# Altium PCB pcb_drive_2024-08-23.pcbdoc
Units mm, origin at the board's own origin, x right, y up, seen from the top; angles counter-clockwise.
Board outline 81.4 x 79.65 mm, 2 copper layers (Top Layer, Bottom Layer); 50 components, 76 nets, 265 pads, 364 vias.
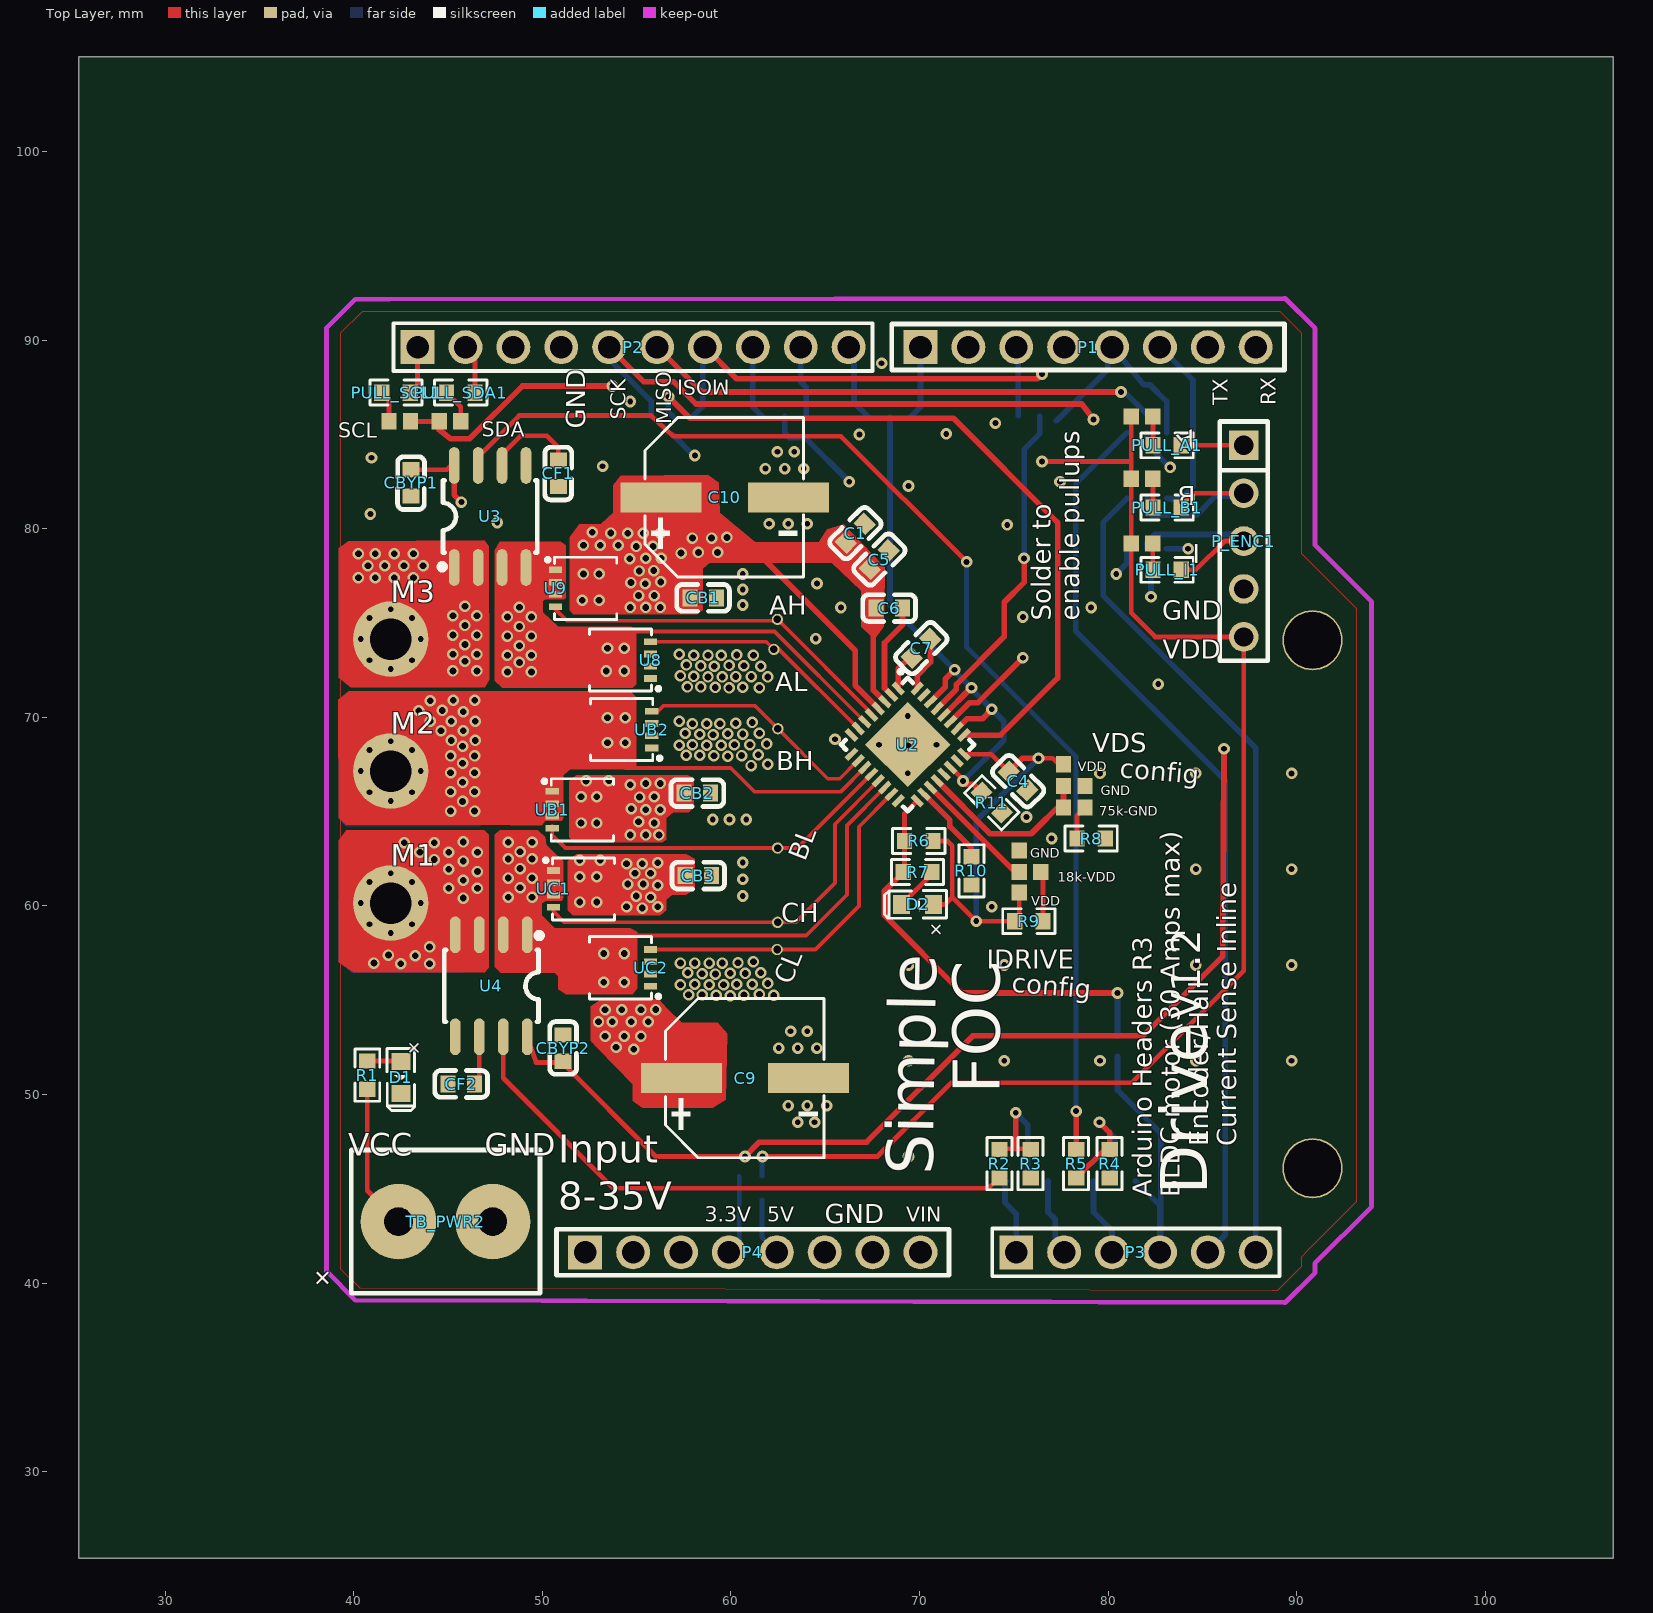
[diagram p0: Top Layer view]
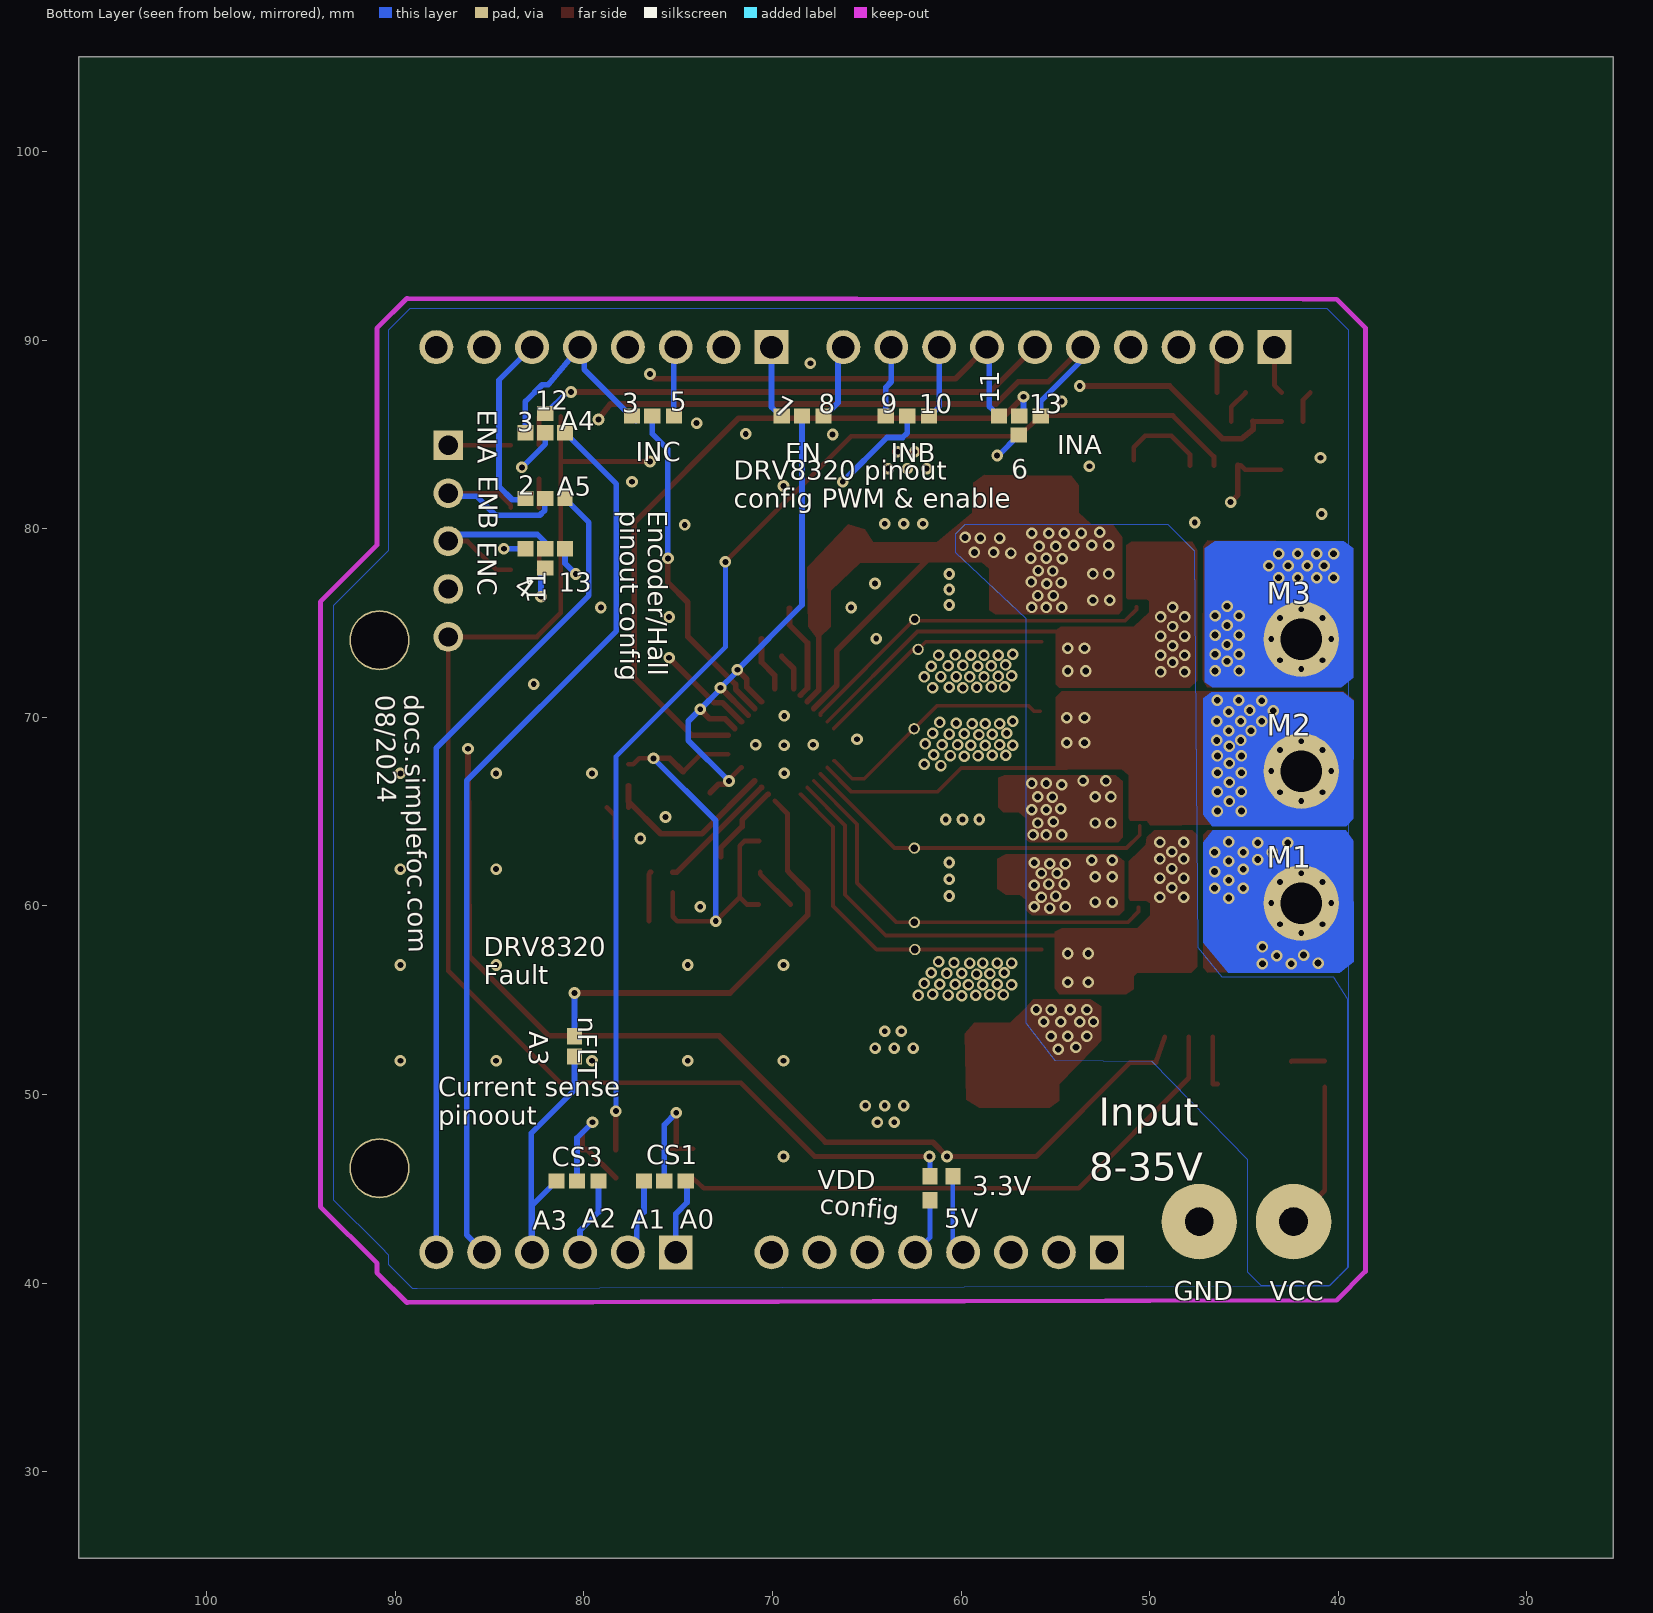
[diagram p1: Bottom Layer view, seen from below]

## Layer stack, top to bottom
Top Layer: signal copper (thickness not stored)
Dielectric: dielectric 0.32, FR-4, Dk 4.8
Bottom Layer: signal copper (thickness not stored)

## Board outline
106.799,25.4 25.4,25.4 25.4,105.046 106.799,105.046

## Components (designator, comment, footprint, x,y, rotation, side; value= is the part's Value field where it differs from the comment)
C1 "C0603B104K160NT" C0603 66.591,79.766 r225 top
C4 "1uF" C0603 75.227,66.622 r135 top
C5 "C0603B104K160NT" C0603 67.861,78.369 r225 top
C6 "1uF" C0603 68.398,75.795 r0 top
C7 "47nF" C0603 70.084,73.67 r225 top
C9 "220uF" CAP-SMD_BD8.0-L8.3-W8.3-LS9.5-FD 60.749,50.874 r0 top
C10 "220uF" CAP-SMD_BD8.0-L8.3-W8.3-LS9.5-FD 59.67,81.671 r0 top
CB1 "C0603B104K160NT" C0603 58.527,76.337 r0 top
CB2 "C0603B104K160NT" C0603 58.209,65.987 r180 top
CB3 "C0603B104K160NT" C0603 58.273,61.605 r0 top
CBYP1 "1uF" C0603 43.033,82.433 r90 top
CBYP2 "1uF" C0603 51.097,52.461 r270 top
CF1 "1nF" C0603 50.843,82.941 r90 top
CF2 "1nF" C0603 45.7,50.556 r0 top
D1 "LED-0603_R" LED0603_RED 42.49,50.903 r270 top
D2 "LED-0603_R" LED0603_RED 69.893,60.081 r180 top
M1 "M2 PLATED HOLE WITH MINI HOLES" "M2 PLATED HOLE WITH MINI HOLES" 41.954,60.152 r0 top
M2 "M2 PLATED HOLE WITH MINI HOLES" "M2 PLATED HOLE WITH MINI HOLES" 41.954,67.152 r0 top
M3 "M2 PLATED HOLE WITH MINI HOLES" "M2 PLATED HOLE WITH MINI HOLES" 41.954,74.152 r0 top
P1 "Header-Female-2.54_1x8" HDR-TH_8P-P2.54-V-F-1 78.939,89.638 r0 top
P2 "Header-Male-2.54_1x10" HDR-TH_10P-P2.54-V-M-1 54.809,89.638 r0 top
P3 "HEADER_6" HDR-M-2.54_1X6 81.479,41.632 r0 top
P4 "Header-Female-2.54_1x8" HDR-TH_8P-P2.54-V-F-1 61.159,41.632 r0 top
P_ENC1 "Header-Female-2.54_1x5" HDR-TH_5P-P2.54-V-F 87.194,79.351 r270 top
PULL_A1 "3.3k" R0603 83.13,84.431 r0 top
PULL_B1 "3.3k" R0603 83.13,81.129 r0 top
PULL_I1 "3.3k" R0603 83.13,77.827 r0 top
PULL_SCL1 "4.7k" R0603 42.236,87.225 r0 top
PULL_SDA1 "4.7k" R0603 45.665,87.225 r0 top
R1 "4.7k" R0603 40.712,51.03 r270 top
R2 "4.7k" R0603 74.24,46.331 r90 top
R3 "10k" R0603 75.891,46.331 r270 top
R4 "10K" R0603 80.082,46.331 r270 top
R5 "4.7k" R0603 78.304,46.331 r270 top
R6 "4.7k" R0603 69.958,63.448 r0 top
R7 "4.7k" R0603 69.894,61.797 r0 top
R8 "75k" R0603 79.101,63.574 r0 top
R9 "18k" R0603 75.8,59.194 r180 top
R10 "47k" R0603 72.751,61.859 r270 top
R11 "4.7kΩ" R0603 73.83,65.479 r135 top
TB_PWR2 "TB002-500-02BE" TB002-500-02BE 42.363,43.258 r0 top
U2 "DRV8320HRTVT" WQFN-32_L5.0-W5.0-P0.50-TL-EP 69.371,68.556 r315 top
U3 "ACS712ELCTR-30A-T" SOIC-8_L5.0-W4.0-P1.27-LS6.0-BL 47.224,80.655 r0 top
U4 "ACS712ELCTR-30A-T" SOIC-8_L5.0-W4.0-P1.27-LS6.0-BL 47.287,55.763 r180 top
U8 "BSZ0901NSATMA1" DFN-8_L3.3-W3.3-P0.65-BL-2 54.969,73.036 r90 top
U9 "BSZ0901NSATMA1" DFN-8_L3.3-W3.3-P0.65-BL-2 51.464,76.846 r270 top
UB1 "BSZ0901NSATMA1" DFN-8_L3.3-W3.3-P0.65-BL-2 51.288,65.098 r270 top
UB2 "BSZ0901NSATMA1" DFN-8_L3.3-W3.3-P0.65-BL-2 55.034,69.352 r90 top
UC1 "BSZ0901NSATMA1" DFN-8_L3.3-W3.3-P0.65-BL-2 51.351,60.907 r270 top
UC2 "BSZ0901NSATMA1" DFN-8_L3.3-W3.3-P0.65-BL-2 54.971,56.716 r90 top

## Footprints (in the part's own frame and the unit in brackets; to place one, negate y for a bottom-side part, rotate by r counter-clockwise, add the part's x,y. Pads: shape width x height; smd on the part's side, far side on the other; paste and mask are expansions set on the pad)
C0603 [mm]
  rect 0.8x0.9 smd paste+0 mask+0.051: 1(-0.7,0) 2(0.7,0)
  silkscreen extent -1.41,-0.71 1.39,0.72
CAP-SMD_BD8.0-L8.3-W8.3-LS9.5-FD [mm]
  rect 4.3x1.6 smd paste+0 mask+0.051: 1(-3.373,0) 2(3.373,0)
  silkscreen extent -4.23,-4.23 4.18,4.23
DFN-8_L3.3-W3.3-P0.65-BL-2 [mm]
  rect 0.35x0.7 smd paste-100 mask+0.051: 1(-0.975,-0.765) 2(-0.325,-0.765) 3(0.325,-0.765) 4(0.975,-0.765)
  Top Layer region: -1.176,0.187 -1.176,2.115 -1.176,2.115 -1.176,2.685 -0.775,2.685 -0.775,2.115 -0.526,2.115 -0.526,2.685 -0.125,2.685 -0.125,2.115 0.125,2.115 0.125,2.685 0.525,2.685 0.525,2.115 0.774,2.115 0.774,2.685 0.774,2.115 0.774,2.685 1.176,2.685 1.176,2.115 1.176,2.115 1.176,0.187
  silkscreen extent -1.65,-1.28 1.65,2.48
HDR-M-2.54_1X6 [mm]
  rect 1.8x1.8 hole 1.2 paste+0 mask+0.051: 1(-6.35,0)
  round 1.8 hole 1.2 paste+0 mask+0.051: 2(-3.81,0) 3(-1.27,0) 4(1.27,0) 5(3.81,0) 6(6.35,0)
  silkscreen extent -7.62,-1.27 7.62,1.27
HDR-TH_5P-P2.54-V-F [mil]
  rect 62x62 hole 40.16 paste+0 mask+2: 1(-200,0)
  round 62 hole 40.16 paste+0 mask+2: 2(-100,0) 3(0,0) 4(100,0) 5(200,0)
  silkscreen extent -250,-50 250,50
HDR-TH_8P-P2.54-V-F-1 [mm]
  rect 1.8x1.8 hole 1.2 paste+0 mask+0.051: 1(-8.89,0)
  round 1.8 hole 1.2 paste+0 mask+0.051: 2(-6.35,0) 3(-3.81,0) 4(-1.27,0) 5(1.27,0) 6(3.81,0) 7(6.35,0) 8(8.89,0)
  silkscreen extent -10.41,-1.22 10.41,1.22
HDR-TH_10P-P2.54-V-M-1 [mm]
  rect 1.8x1.8 hole 1.2 paste+0 mask+0.051: 1(-11.43,0)
  round 1.8 hole 1.2 paste+0 mask+0.081: 2(-8.89,0) 3(-6.35,0) 4(-3.81,0) 5(-1.27,0) 6(1.27,0) 7(3.81,0) 8(6.35,0) 9(8.89,0) 10(11.43,0)
  silkscreen extent -12.7,-1.27 12.7,1.27
LED0603_RED [mm]
  rect 0.9x1 smd paste+0 mask+0.051: 1(-0.85,0) 2(0.85,0)
  silkscreen extent -1.54,-0.73 1.75,0.73
"M2 PLATED HOLE WITH MINI HOLES" [mm]
  round 0.61 hole 0.305 paste+0: 1(-1.588,0) 1(-1.123,-1.123) 1(-1.123,1.123) 1(0,-1.588) 1(0,1.588) 1(1.123,-1.123) 1(1.123,1.123) 1(1.588,0)
  round 4 hole 2.2 paste+0 mask+0.051: 1(0,0)
R0603 [mm]
  rect 0.806x0.864 smd paste-100 mask+0.051: 1(-0.753,0) 2(0.753,0)
  silkscreen extent -1.39,-0.66 1.39,0.66
SOIC-8_L5.0-W4.0-P1.27-LS6.0-BL [mil]
  oval 22.38x76.78 smd paste+0 mask+2: 1(-75,-106.5) 2(-25,-106.5) 3(25,-106.5) 4(75,-106.5) 5(75,106.5) 6(25,106.5) 7(-25,106.5) 8(-75,106.5)
  silkscreen extent -106,-111 98,75
TB002-500-02BE [mm]
  round 4 hole 1.5 slot 1.505 at 0 deg paste+0 mask+0.051: 1(0,0) 2(5,0)
  silkscreen extent -2.5,-3.8 7.5,3.8
WQFN-32_L5.0-W5.0-P0.50-TL-EP [mil]
  rect 30x11.3 smd paste+0 mask+2: 1(-97,68.9) 2(-97,49.21) 3(-97,29.53) 4(-97,9.84) 5(-97,-9.84) 6(-97,-29.53) 7(-97,-49.21) 8(-97,-68.9) 17(97,-68.9) 18(97,-49.21) 19(97,-29.53) 20(97,-9.84) 21(97,9.84) 22(97,29.53) 23(97,49.21) 24(97,68.9)
  rect 11.3x30 smd paste+0 mask+2: 9(-68.9,-97) 10(-49.21,-97) 11(-29.53,-97) 12(-9.84,-97) 13(9.84,-97) 14(29.53,-97) 15(49.21,-97) 16(68.9,-97) 25(68.9,97) 26(49.21,97) 27(29.53,97) 28(9.84,97) 29(-9.84,97) 30(-29.53,97) 31(-49.21,97) 32(-68.9,97)
  rect 126x126 smd paste+0 mask+2: 33(0,0)
  silkscreen extent -121,-98 98,101

## Free pads (board coordinates)
  rect 0.806x0.864 smd paste-100 mask+0.051: 1(82.368,82.653) 1(82.368,85.955) 2(41.855,85.701) 2(42.998,85.701) 2(44.522,85.701) 2(45.665,85.701) 2(75.29,61.796) 2(75.291,60.717) 2(75.291,62.939) 2(76.434,61.796) 2(77.639,66.367) 2(77.639,67.51) 2(77.639,65.224) 2(78.782,65.224) 2(78.782,66.367) 2(81.225,79.224) 2(81.225,82.653) 2(81.225,85.955) 2(82.368,79.224)
  rect 0.864x0.806 smd far side paste-100 mask+0.051: 2(55.766,85.98) 2(56.909,85.98) 2(56.939,84.974) 2(57.988,85.98) 2(61.701,85.98) 2(62.845,85.98) 2(63.987,85.98) 2(67.289,85.98) 2(68.433,85.98) 2(69.512,85.98) 2(74.592,45.413) 2(75.227,85.98) 2(75.735,45.413) 2(76.37,85.98) 2(76.814,45.413) 2(77.449,85.98) 2(79.227,45.413) 2(80.37,45.413) 2(81.006,78.941) 2(81.006,85.1) 2(81.45,45.413) 2(82.043,85.101) 2(82.043,86.116) 2(82.044,77.925) 2(82.044,78.941) 2(82.044,81.608) 2(83.101,81.608) 2(83.101,78.941) 2(83.101,85.1)
  rect 0.806x0.864 smd far side paste-100 mask+0.051: 2(60.431,45.667) 2(61.638,44.397) 2(61.638,45.667) 2(80.498,53.096) 2(80.498,52.017)
  rect 0.806x0.806 smd far side paste-100 mask+0.051: 2(81.006,81.608)
  round 0.6 hole 0.4 paste-100 mask+0.051: 5(62.274,73.608) 5(62.449,57.69) 5(62.464,75.194) 5(62.475,59.13) 5(62.475,63.067) 5(62.485,69.397)
  round 3.2 hole 3 slot 3.005 at 0 deg paste+0 mask+0.102: T2(90.845,74.092) T3(90.845,46.092)

## Via types
v1: diameter 0.61, hole 0.356, Top Layer to Bottom Layer, tented both sides, 254 vias
v2: diameter 0.62, hole 0.31, Top Layer to Bottom Layer, tented both sides, 73 vias
v3: diameter 0.61, hole 0.305, Top Layer to Bottom Layer, tented both sides, 25 vias
v4: diameter 0.62, hole 0.356, Top Layer to Bottom Layer, tented both sides, 12 vias

## Nets (pads, with @x,y where several pads share a name; then routed paths per layer and width w, separated by ;. In a path a pad name is that pad's centre, name@x,y a point inside that pad or via, vN(x,y) a via of type N, cw(c..) or ccw(c..) an arc to the next point about the centre after c; other vN are vias at no path point)
3.3V: P4.4 pad.2@60.431,45.667 | length 4.3
  Bottom Layer w0.254: P4.4 60.433,42.176 pad.2@60.433,45.668
+5V: CBYP1.2 CBYP2.2 P4.5 pad.2@61.638,44.397 U3.8 U4.8 | length 114.5
  Top Layer w0.254: CBYP1.2 44.936,83.133 45.165,83.362 U3.8@45.32,83.362 ; U4.8@49.193,53.059 49.666,51.701 51.032,51.701 56.021,46.712 v2(60.739,46.712)
  Top Layer w0.3: U3.8 45.319,81.798 v2(45.7,81.418) ; v2@60.737,46.712 61.499,47.474 67.192,47.474 72.825,53.108 81.842,53.108 86.087,57.352 v2(86.149,68.337)
  Mid-Layer 1 w0.3: v2@45.701,81.419 64.565,81.419 75.096,70.888 83.597,70.888 v2@86.15,68.338 ; v2@60.737,46.712 60.737,44.789 62.429,43.098 P4.5
  Bottom Layer w0.254: pad.2@61.639,44.398 61.639,42.422 P4.5
C1_OUT: R5.1 U3.7 | length 64
  Top Layer w0.254: U3.7@46.59,83.362 46.59,83.832 48.764,86.006 55.766,86.006 56.939,84.91 65.83,84.911 v3@72.498,78.244
  Top Layer w0.3: R5.1 v3(78.304,49.125)
  Bottom Layer w0.254: v3(72.497,78.243) 72.497,73.728 78.304,67.921 v3(78.304,49.125)
C1_OUT_SCALED: pad.2@80.37,45.413 R4.1 R5.2 | length 7.5
  Top Layer w0.3: R5.2 79.846,47.085 R4.1@80.082,47.085 ; v2(79.545,48.525) 80.082,47.987 R4.1
  Bottom Layer w0.3: v2(79.545,48.525) 80.37,47.699 pad.2@80.37,45.413
C2_OUT: R2.1 U4.7 | length 31.1
  Top Layer w0.254: U4.7@47.923,53.059 47.923,50.875 53.765,45.033 73.64,45.032 R2.1
C6_2: C6.2 U2.2 | length 5.2
  Top Layer w0.3: U2.2@68.512,71.182 68.144,71.551 68.144,73.953 69.099,74.909 C6.2
C7_1: C7.1 U2.32 | length 2.9
  Top Layer w0.3: U2.32 69.876,72.231 70.577,72.932 C7.1@70.577,74.164
C7_2: C7.2 U2.1 | length 2
  Top Layer w0.3: U2.1@68.865,71.535 68.865,72.582 C7.2@69.513,73.23
CF1_2: CF1.2 U3.6 | length 4.9
  Top Layer w0.254: U3.6@47.86,83.362 47.86,83.959 48.84,84.939 50.237,84.939 50.844,84.332 CF1.2
CF2_2: CF2.2 U4.6 | length 2.8
  Top Layer w0.254: CF2.2@46.399,50.558 46.653,50.558 U4.6@46.653,53.059
CS_OUT_SCALED: pad.2@75.735,45.413 R2.2 R3.1 | length 7.4
  Top Layer w0.254: R2.2@74.211,47.127 R3.1@75.862,47.127
  Top Layer w0.3: 75.1,47.127 v2(75.1,49.033)
  Bottom Layer w0.3: v2(75.1,49.033) 75.735,48.398 pad.2@75.735,45.413
D1_1: D1.1 R1.1 | length 1.8
  Top Layer w0.254: R1.1@40.712,51.784 42.46,51.784 D1.1@42.49,51.754
D2_2: D2.2 R7.2 | length 2.4
  Top Layer w0.254: D2.2@69.043,60.083 70.646,61.685 R7.2@70.646,61.797
DVDD: C4.2 D2.1 pad.2@75.291,60.717 pad.2@77.639,67.51 R6.2 R9.2 U2.24 | length 26.6
  Top Layer w0.254: R6.2@70.71,63.448 71.482,63.448 71.736,63.194 71.736,60.464 ; D2.1@70.743,60.083 71.355,60.083 71.736,60.464 ; U2.24@72.35,68.051 73.798,68.051 C4.2 ; pad.2@75.292,60.718 75.292,59.44 75.045,59.194 v2(73.006,59.194) 71.736,60.464 ; v2(76.307,67.829) 77.068,67.829 77.386,67.511 pad.2@77.64,67.511
  Top Layer w0.3: C4.2 75.444,67.83 v2@76.308,67.83
  Bottom Layer w0.3: v2(73.006,59.194) 73.006,64.528 v2(76.307,67.829)
ENABLE: pad.2@68.433,85.98 R11.2 U2.22 U2.26 U2.28 U2.30 | length 31.5
  Top Layer w0.254: U2.22@71.644,67.344 72.306,66.682 v2(72.306,66.622)
  Top Layer w0.3: U2.30@70.583,70.829 71.355,71.599 71.355,72.021 v2@71.863,72.529 ; U2.28 72.744,71.575 v2(72.751,71.575) ; U2.26@71.997,69.415 72.508,69.925 73.322,69.924 v2@73.831,70.433 ; v2(72.306,66.622) 72.472,66.456 72.853,66.456 R11.2
  Bottom Layer w0.3: pad.2@68.434,85.927 68.434,75.958 v2@71.863,72.529 ; v2(71.862,72.528) 71.989,72.4 71.989,72.337 v2(72.751,71.575) 72.814,71.512 72.814,71.448 v2(73.83,70.432) 74.465,69.797 74.465,68.781 v2(72.306,66.622)
ENC_A: P_ENC1.1 pad.2@82.043,85.101 PULL_A1.2 | length 10.1
  Top Layer w0.254: PULL_A1.2 P_ENC1.1
  Mid-Layer 1 w0.3: v2(83.292,83.259) 86.022,83.259 P_ENC1.1
  Bottom Layer w0.3: pad.2@82.044,85.1 82.044,84.507 v2(83.292,83.259)
ENC_A_SP: pad.1@82.368,85.955 PULL_A1.1 | length 1.5
  Top Layer w0.254: pad.1@82.368,85.955 82.376,85.947 PULL_A1.1@82.376,84.431
ENC_B: P_ENC1.2 pad.2@82.044,81.608 PULL_B1.2 | length 10
  Top Layer w0.254: PULL_B1.2 83.884,81.248 84.527,81.891 P_ENC1.2
  Bottom Layer w0.3: pad.2@82.084,81.609 82.084,80.974 82.34,80.72 84.69,80.72 85.706,81.736 87.039,81.736 P_ENC1.2
ENC_B_SP: pad.1@82.368,82.653 PULL_B1.1 | length 1.5
  Top Layer w0.254: pad.1@82.368,82.653 82.376,82.645 PULL_B1.1@82.376,81.129
ENC_I: P_ENC1.3 pad.2@82.044,78.941 PULL_I1.2 | length 9.8
  Top Layer w0.254: PULL_I1.2 84.654,77.827 86.178,79.351 P_ENC1.3
  Bottom Layer w0.3: pad.2@82.043,78.942 82.043,79.28 82.467,79.704 86.841,79.704 P_ENC1.3
ENC_I_SP: pad.2@82.368,79.224 PULL_I1.1 | length 1.4
  Top Layer w0.254: pad.2@82.368,79.224 82.368,77.835 PULL_I1.1@82.376,77.827
GHA: pad.5@62.464,75.194 U2.5 U9.4 | length 19.3
  Top Layer w0.2: U9.4@50.699,75.871 50.699,75.719 51.289,75.132 62.528,75.132 67.453,70.207 U2.5
GHB: pad.5@62.475,63.067 U2.12 UB1.4 | length 19.3
  Top Layer w0.2: UB1.4@50.523,64.25 50.523,63.769 51.225,63.067 62.475,63.067 63.529,63.067 U2.12@67.453,66.991
GHC: pad.5@62.475,59.13 U2.13 UC1.4 | length 22.6
  Top Layer w0.2: UC1.4@50.585,59.933 50.585,59.704 51.162,59.13 62.475,59.13 63.417,59.13 65.513,61.226 65.513,64.337 U2.13@67.806,66.638
GLA: pad.5@62.274,73.608 U2.7 U8.4 | length 12.9
  Top Layer w0.2: U8.4 61.87,74.009 62.274,73.608 62.551,73.608 U2.7@66.745,69.415
GLB: pad.5@62.485,69.397 U2.10 UB2.4 | length 13.1
  Top Layer w0.2: UB2.4 56.135,70.326 56.432,70.624 61.258,70.624 62.485,69.397 65.132,66.75 65.767,66.75 66.714,67.697 U2.10@66.745,67.697
GLC: pad.5@62.449,57.69 U2.15 UC2.4 | length 18.7
  Top Layer w0.2: UC2.4 62.449,57.69 64.474,57.69 66.783,59.999 66.783,64.2 U2.15@68.512,65.93
GND: C1.1 C4.1 C5.1 C9.2 C10.2 CB1.2 CB2.1 CB3.2 CBYP1.1 CBYP2.1 CF1.1 CF2.1 D1.2 P2.4 P4.6 P4.7 P_ENC1.4 pad.2@75.291,62.939 pad.2@78.782,66.367 R3.2 R4.2 R8.2 R10.2 R11.1 TB_PWR2.2 U2.8 U2.9 U2.16 U2.23 U2.31 U2.33 U3.5 U4.5 U8.1 U8.2 U8.3 UB2.1 UB2.2 UB2.3 UC2.1 UC2.2 UC2.3
  other v1: 59.962,55.243 62.273,55.256 59.225,55.268 60.689,55.276 57.752,55.294 58.463,55.294 61.511,55.319 57.32,55.827 58.844,55.827 59.606,55.827 58.082,55.852 60.308,55.847 61.134,55.847 61.956,55.891 59.174,56.386 58.463,56.411 60.753,56.419 59.962,56.437 57.701,56.462 61.575,56.462 57.32,56.97 58.082,56.97 58.844,56.97 59.543,56.97 60.372,56.99 61.194,57.034 61.067,67.448 61.956,67.511 59.835,67.943 59.098,67.968 60.562,67.976 57.625,67.994 58.336,67.994 61.448,68.019 57.257,68.527 58.717,68.527 59.479,68.527 57.955,68.552 60.181,68.547 61.007,68.547 61.892,68.591 59.047,69.086 58.336,69.111 60.626,69.119 59.835,69.137 57.574,69.162 61.511,69.162 57.955,69.67 58.717,69.67 59.416,69.67 60.245,69.69 61.13,69.734 57.257,69.797 59.898,71.562 59.162,71.588 61.511,71.575 57.688,71.613 58.4,71.613 60.626,71.595 58.781,72.147 59.543,72.147 61.956,72.147 58.019,72.172 60.245,72.167 61.07,72.167 57.32,72.21 59.111,72.705 58.4,72.731 61.575,72.718 59.898,72.756 60.689,72.738 57.638,72.782 58.019,73.29 58.781,73.29 59.479,73.29 61.194,73.29 60.308,73.31 57.257,73.353
  other v2: 69.414,46.712 69.414,51.792 74.494,51.792 79.574,51.792 84.654,51.792 89.734,51.792 69.414,56.872 74.494,56.872 84.654,56.872 89.734,56.872 73.83,59.955 60.622,60.526 60.622,61.415 84.654,61.952 89.734,61.952 60.622,62.304 77.005,63.574 59.034,64.59 59.923,64.59 60.812,64.59 75.672,64.717 79.574,67.032 84.654,67.032 89.734,67.032 65.512,68.845 82.657,71.766 64.496,74.179 75.481,75.322 65.829,75.83 79.101,75.83 60.622,75.957 60.622,76.782 64.559,77.1 60.622,77.608 74.656,80.211 47.605,80.338 40.874,80.783 69.414,82.272 77.45,82.497 53.193,83.323 40.937,83.767 66.811,85.002 71.417,85.037 74.021,85.609 54.653,86.752 67.988,88.784
  other v3: 63.543,48.525 64.432,48.525 63.035,49.414 64.051,49.414 65.067,49.414 62.527,52.462 63.543,52.462 64.559,52.462 63.162,53.351 64.051,53.351 69.371,67.032 69.385,68.527 67.847,68.556 70.895,68.556 69.371,70.08 62.019,80.275 63.035,80.275 64.051,80.275 61.829,83.196 62.845,83.196 63.861,83.196 62.464,84.085 63.353,84.085
IDRIVE: pad.2@75.29,61.796 U2.19 | length 6.6
  Top Layer w0.3: U2.19 75.07,61.796 pad.2@75.29,61.796
INHA: pad.2@56.909,85.98 U2.25 | length 39
  Top Layer w0.3: v2(56.685,87.006) 57.828,85.862 71.798,85.862 77.324,80.337 77.324,72.084 ; U2.25 74.291,69.061 77.323,72.083
  Bottom Layer w0.3: v2(56.685,87.006) 56.685,86.204 pad.2@56.909,85.98
INHB: pad.2@62.845,85.98 U2.27 | length 23.8
  Top Layer w0.3: U2.27 72.66,70.784 73.102,70.784 v2(75.481,73.163)
  Mid-Layer 1 w0.3: v2@66.275,82.498 75.481,73.292 v2(75.481,73.163)
  Bottom Layer w0.3: pad.2@62.845,85.98 62.845,85.1 63.099,84.846 63.924,84.846 v2(66.274,82.497)
INHC: pad.2@76.37,85.98 U2.29 | length 17.8
  Top Layer w0.3: U2.29 71.953,71.491 71.953,71.745 74.493,74.285 74.493,76.111 75.545,77.163 v2(75.545,78.433)
  Bottom Layer w0.3: v2@75.546,78.434 75.546,84.213 76.371,85.038 pad.2@76.371,85.98
MODE: R10.1 U2.18 | length 4.4
  Top Layer w0.3: U2.18 71.608,64.552 71.608,64.209 72.751,63.066 R10.1
NFLT: pad.2@80.498,53.096 R6.1 R7.1 U2.17 | length 23.2
  Top Layer w0.254: R7.1@69.14,61.797 69.203,61.861 69.203,63.448 69.203,64.903 U2.17@69.876,65.577
  Top Layer w0.3: R7.1 68.125,60.781 68.125,59.511 72.253,55.382 v2(80.498,55.383)
  Bottom Layer w0.3: pad.2@80.498,53.097 v2(80.498,55.383)
P1_7: P1.7
P1_8: P1.8
P2_3: P2.3
P4_1: P4.1
P4_2: P4.2
P4_3: P4.3
PIN2: P1.6 pad.2@83.101,81.608 | length 9.8
  Bottom Layer w0.3: P1.6 84.499,87.888 84.499,82.244 83.801,81.546 83.42,81.546 83.356,81.609 pad.2@83.102,81.609
PIN3: P1.5 pad.2@77.449,85.98 pad.2@83.101,85.1 | length 11
  Bottom Layer w0.3: pad.2@77.259,85.736 79.989,88.466 79.989,89.418 P1.5 81.896,87.642 82.213,87.642 83.102,86.753 pad.2@83.102,85.102
PIN4: P1.4 pad.2@83.101,78.941 | length 15.9
  Mid-Layer 1 w0.3: P1.4 79.158,88.15 81.388,88.15 82.213,87.324 82.213,80.974 v2@84.245,78.942
  Bottom Layer w0.3: pad.2@83.101,78.941 v2(84.244,78.941)
PIN5: P1.3 pad.2@75.227,85.98 | length 3.7
  Bottom Layer w0.3: P1.3 75.228,89.638 pad.2@75.228,85.991
PIN6: P1.2 pad.2@56.939,84.974 | length 18.5
  Mid-Layer 1 w0.3: v2(58.082,83.894) 60.393,86.205 69.156,86.205 P1.2
  Bottom Layer w0.3: pad.2@56.939,84.973 58.018,83.894 v2(58.082,83.894)
PIN7: P1.1 pad.2@69.512,85.98 | length 3.9
  Bottom Layer w0.3: pad.2@69.513,85.927 70.049,86.463 P1.1
PIN8: P2.10 pad.2@67.289,85.98 | length 4.1
  Bottom Layer w0.3: P2.10 66.528,89.35 66.528,86.688 pad.2@67.29,85.926
PIN9: P2.9 pad.2@63.987,85.98 | length 3.8
  Bottom Layer w0.3: P2.9 63.699,87.802 63.988,87.513 pad.2@63.988,85.926
PIN10: P2.8 pad.2@61.701,85.98 | length 3.9
  Bottom Layer w0.3: P2.8 61.159,86.468 pad.2@61.702,85.926
PIN11: P2.7 pad.2@57.988,85.98 pad.2@82.044,77.925 | length 39.6
  Top Layer w0.3: P2.7 60.298,87.959 76.244,87.959 v2@76.498,88.213
  Mid-Layer 1 w0.3: v2@76.498,88.213 77.451,87.261 79.292,87.261 81.388,85.165 81.388,78.876 82.276,77.988 v2(82.276,76.401)
  Bottom Layer w0.3: pad.2@57.988,85.98 58.496,86.488 58.496,89.515 P2.7 ; pad.2@82.043,77.99 82.276,77.757 v2(82.276,76.401)
  other v2: 76.497,88.212
PIN12: P2.6 pad.2@82.043,86.116 | length 27.4
  Top Layer w0.3: P2.6 58.457,87.261 77.006,87.261 77.007,87.26 v2(80.688,87.26)
  Bottom Layer w0.3: v2(80.688,87.26) 80.879,87.26 pad.2@82.022,86.117
PIN13: P2.5 pad.2@55.766,85.98 pad.2@81.006,78.941 | length 42.2
  Top Layer w0.3: P2.5 55.381,87.796 56.973,87.796 58.147,86.626 78.593,86.624 v2(79.229,85.8)
  Mid-Layer 1 w0.3: v2(79.229,85.8) 80.434,84.595 v2(80.434,77.608)
  Bottom Layer w0.3: P2.5 53.539,89.008 55.767,86.78 pad.2@55.767,85.98 ; v2(80.434,77.608) 81.006,78.179 pad.2@81.006,78.941
PINA0: P3.1 pad.2@74.592,45.413 | length 4.1
  Bottom Layer w0.3: pad.2@74.592,45.413 74.529,45.349 74.529,44.27 75.129,43.669 P3.1
PINA1: P3.2 pad.2@76.814,45.413 | length 4.1
  Bottom Layer w0.3: pad.2@76.815,45.413 76.815,43.762 77.196,43.381 77.196,42.106 P3.2
PINA2: P3.3 pad.2@79.227,45.413 | length 4.2
  Bottom Layer w0.3: pad.2@79.228,45.413 79.228,43.762 80.209,42.78 P3.3
PINA3: P3.4 pad.2@80.498,52.017 pad.2@81.45,45.413 | length 15.7
  Bottom Layer w0.3: pad.2@80.499,52.018 80.499,50.238 82.785,47.954 82.785,41.668 P3.4 82.749,44.114 pad.2@81.45,45.413
PINA4: P3.5 pad.2@81.006,85.1 | length 48.3
  Bottom Layer w0.3: pad.2@81.007,85.102 78.276,82.371 78.276,74.583 86.214,66.646 86.214,42.557 P3.5
PINA5: P3.6 pad.2@81.006,81.608 | length 43.9
  Bottom Layer w0.3: pad.2@81.006,81.608 79.736,80.338 79.736,76.464 87.829,68.371 P3.6
R8_1: pad.2@78.782,65.224 R8.1 | length 1.8
  Top Layer w0.254: R8.1 78.346,64.788 pad.2@78.783,65.225
R9_1: pad.2@76.434,61.796 R9.1 | length 2.7
  Top Layer w0.254: pad.2@76.498,61.797 76.435,61.797 76.551,61.678 R9.1@76.551,59.194
S$1126: 
S$8786: 
SCL: P2.1 PULL_SCL1.2 | length 2.6
  Top Layer w0.254: PULL_SCL1.2 43.379,87.614 P2.1
SCL_SP: pad.2@41.855,85.701 PULL_SCL1.1 | length 1.7
  Top Layer w0.254: PULL_SCL1.1@41.482,87.225 41.855,86.852 pad.2@41.855,85.701
SDA: P2.2 PULL_SDA1.2 | length 2.6
  Top Layer w0.254: P2.2 46.419,89.138 PULL_SDA1.2
SDA_SP: pad.2@45.665,85.701 PULL_SDA1.1 | length 1.8
  Top Layer w0.254: PULL_SDA1.1@44.911,87.225 45.665,86.471 pad.2@45.665,85.701
SHA: U2.6 U3.3 U3.4 U9.1 U9.2 U9.3 | length 14.6
  Top Layer w0.2: 54.527,74.561 62.307,74.561 U2.6@67.098,69.768
  other v1: 48.146,72.408 49.416,72.408 48.781,72.916 48.146,73.297 49.416,73.297 48.781,73.805 48.146,74.313 49.416,74.313 48.781,74.821 48.146,75.329 49.416,75.329 48.781,75.837
  other v4: 53.383,72.464 54.336,72.464 53.447,73.671 54.336,73.671
SHA_CS: M3.1 U3.1 U3.2
  other v1: 45.255,72.464 46.525,72.464 45.89,72.972 45.255,73.353 46.525,73.353 45.89,73.861 45.255,74.369 46.525,74.369 45.89,74.877 45.255,75.385 46.525,75.385 45.89,75.893 40.24,77.414 41.129,77.414 42.145,77.414 43.161,77.414 40.748,78.049 41.637,78.049 42.653,78.049 43.669,78.049 40.24,78.684 41.129,78.684 42.145,78.684 43.161,78.684
SHB: M2.1 U2.11 UB1.1 UB1.2 UB1.3 | length 14.1
  Top Layer w0.2: 54.146,67.576 54.4,67.322 59.988,67.322 61.258,66.052 65.805,66.052 U2.11@67.098,67.344
  other v1: 45.128,65.035 46.398,65.035 45.763,65.543 45.128,66.051 46.398,66.051 45.763,66.559 45.128,67.067 46.398,67.067 45.763,67.575 45.128,67.956 46.398,67.956 45.763,68.464 45.167,68.778 46.437,68.778 44.62,69.289 45.802,69.286 44.049,69.797 45.167,69.794 46.437,69.794 45.802,70.302 43.439,70.356 44.684,70.369 44.049,70.877 45.269,70.911 46.412,70.911
  other v4: 53.447,68.654 54.399,68.654 53.447,69.988 54.399,69.988
SHC: U2.14 U4.1 U4.2 UC1.1 UC1.2 UC1.3 | length 23.4
  Top Layer w0.2: 50.146,58.432 63.989,58.432 66.148,60.591 66.148,64.274 U2.14
  other v1: 48.18,60.462 49.45,60.462 48.815,60.97 48.18,61.478 49.45,61.478 48.815,61.986 48.18,62.494 49.45,62.494 48.815,62.875 48.18,63.383 49.45,63.383
  other v4: 53.256,55.954 54.336,55.954 53.256,57.478 54.336,57.478
SHC_CS: M1.1 U4.3 U4.4
  other v1: 42.491,56.937 44.015,56.937 41.064,56.97 43.261,57.363 41.834,57.397 44.015,57.826 45.793,60.42 45.03,60.936 46.554,60.936 45.8,61.363 46.554,61.825 45.03,61.952 45.8,62.379 44.268,62.46 43.506,62.841 45.03,62.841 46.554,62.841 42.673,63.359 44.268,63.349 45.8,63.395
U2_21: U2.21
VCC: C1.2 C5.2 C6.1 C9.1 C10.1 CB1.1 CB2.2 CB3.1 R1.2 TB_PWR2.1 U2.3 U2.4 | length 25.6
  Top Layer w0.254: R1.2 40.712,50.403 40.712,44.909 TB_PWR2.1
  Top Layer w0.3: v1@59.29,78.752 59.29,78.371 61.766,78.371 66.592,73.545 66.592,71.688 U2.4 ; 67.545,74.688 67.545,71.444 U2.3@68.159,70.829
  Top Layer w0.33: v1(59.289,78.751) 59.508,78.97
  other v1: 54.844,52.398 53.906,52.507 53.32,53.097 54.336,53.097 55.225,53.097 53.701,53.859 54.717,53.859 55.606,53.859 52.973,53.864 53.32,54.494 54.209,54.494 55.225,54.494 56.012,54.503 55.288,59.891 54.463,59.955 56.114,59.955 51.986,60.209 52.875,60.209 55.733,60.463 54.971,60.526 56.114,61.098 54.526,61.161 55.352,61.161 51.986,61.542 52.875,61.542 54.907,61.733 55.733,61.733 54.463,62.241 55.288,62.241 56.117,62.291 51.986,62.431 53.066,62.431 54.653,63.765 55.479,63.765 56.177,63.765 52.05,64.4 52.875,64.4 55.923,64.4 55.098,64.463 55.479,65.098 56.241,65.098 54.717,65.162 52.05,65.797 52.875,65.797 55.153,65.774 55.923,65.797 54.653,66.432 55.479,66.495 56.241,66.495 52.316,66.629 53.529,66.639 54.653,75.83 55.479,75.83 56.241,75.83 52.113,76.211 53.002,76.211 55.098,76.465 55.923,76.465 55.457,77.088 54.695,77.152 56.269,77.185 52.177,77.608 53.002,77.608 55.131,77.765 55.902,77.787 54.632,78.422 55.479,78.433 56.304,78.433 57.349,78.716 58.273,78.751 54.971,79.068 55.86,79.068 52.177,79.132 53.066,79.132 54.018,79.132 57.955,79.513 58.971,79.513 59.783,79.542 54.526,79.767 55.352,79.767 56.241,79.767 53.616,79.776 52.647,79.814
VDD: P_ENC1.5 pad.2@42.998,85.701 pad.2@44.522,85.701 pad.2@61.638,45.667 pad.2@81.225,79.224 pad.2@81.225,82.653 pad.2@81.225,85.955 | length 109.4
  Top Layer w0.254: pad.2@42.998,85.701 pad.2@44.522,85.701 ; v2(61.667,46.712) 67.763,46.712 71.672,50.621 81.261,50.621 87.194,56.554 P_ENC1.5 82.495,74.271 81.225,75.541 81.225,79.224 81.225,82.653 pad.2@81.225,85.955 ; v2(76.497,83.577) 81.225,83.577 81.225,83.672
  Top Layer w0.3: pad.2@44.522,85.701 44.493,85.672 44.493,85.291 45.128,84.783 46.144,84.783 48.938,87.577 v2(53.701,87.577)
  Mid-Layer 1 w0.254: v2@53.702,87.578 53.702,85.925 57.065,82.562 64.624,82.562 66.275,84.213 75.861,84.213 v2@76.498,83.578
  Bottom Layer w0.254: pad.2@61.639,45.668 61.639,46.684 v2(61.667,46.712)
VDS: pad.2@77.639,65.224 pad.2@77.639,66.367 U2.20 | length 10.5
  Top Layer w0.254: pad.2@77.64,65.225 pad.2@77.64,66.368
  Top Layer w0.3: U2.20@70.936,66.638 73.745,63.829 75.927,63.829 77.639,65.541 pad.2@77.639,66.367
VIN: P4.8

## Polygon pours and split planes (outlines as drawn)
GND on Mid-Layer 2 (solid): 90.213,40.904 88.943,39.634 88.689,39.634 40.302,39.761 39.286,40.777 39.286,90.434 40.429,91.577 89.07,91.577 90.213,90.434 90.213,90.18 90.213,78.75 93.134,75.829 93.134,75.702 93.134,44.333 90.594,41.793 90.213,41.412 90.213,40.904
VCC on Mid-Layer 2 (solid): 40.366,39.761 40.302,39.761 39.286,40.777 39.223,55.763 39.794,56.144 46.97,56.081 47.478,56.525 47.478,79.004 47.986,79.512 49.319,80.719 59.352,80.719 60.178,80.338 60.241,78.306 56.558,73.988 56.495,52.715 44.938,46.937 44.811,40.714 43.604,39.761
GND on Mid-Layer 1 (solid): 90.213,40.904 88.943,39.634 88.689,39.634 40.302,39.761 39.286,40.777 39.286,90.434 40.429,91.577 89.07,91.577 90.213,90.434 90.213,90.18 90.213,78.75 93.134,75.829 93.134,75.702 93.134,44.333 90.594,41.793 90.213,41.412 90.213,40.904
GND on Top Layer (solid): 90.242,40.87 88.972,39.6 88.718,39.6 40.331,39.727 39.315,40.743 39.315,90.4 40.458,91.543 89.099,91.543 90.242,90.4 90.242,90.146 90.242,78.716 93.163,75.795 93.163,75.668 93.163,44.299 90.623,41.759 90.242,41.378 90.242,40.87
GND on Bottom Layer (solid): 90.369,40.997 89.099,39.727 88.845,39.727 40.458,39.854 39.442,40.87 39.442,90.527 40.585,91.67 89.226,91.67 90.369,90.527 90.369,90.273 90.369,78.843 93.29,75.922 93.29,75.795 93.29,44.426 90.75,41.886 90.369,41.505 90.369,40.997
VCC on Bottom Layer (solid): 44.112,39.888 40.429,39.888 39.477,40.841 39.477,55.065 40.239,56.208 46.144,56.208 47.414,57.795 47.605,78.814 49.002,80.211 59.797,80.211 60.305,79.703 60.305,78.75 56.558,75.258 56.558,53.795 55.034,51.826 49.891,51.763 44.811,46.556 44.811,45.54 44.811,41.095 44.811,40.587

## Keep-outs
Keep-Out Layer:
  lines w0.254: 89.345,38.965 ccw(c89.345,39.092) 89.435,39.002 ; 89.345,92.219 cw(c89.345,92.092) 89.435,92.182 ; 90.935,40.501 ccw(c90.845,40.592) 90.972,40.592 ; 90.935,90.682 cw(c90.845,90.592) 90.972,90.592 ; 93.935,44.001 ccw(c93.845,44.092) 93.972,44.092 ; 93.935,76.182 cw(c93.845,76.092) 93.972,76.092

## Other copper
Top Layer:
  region net SHB: 48.303,64.272 46.703,64.298 39.565,64.298 39.184,64.679 39.159,70.94 39.731,71.384 54.653,71.384 54.971,71.067 54.971,67.447 54.844,67.257 51.478,67.257 51.097,66.939 51.097,66.876 51.097,66.368 51.097,64.653 51.034,64.526 50.145,64.526 49.954,64.272 48.303,64.272
  region net VCC: 54.145,82.814 53.764,82.306 53.764,80.846 53.129,80.274 51.957,80.245 51.449,79.547 51.449,75.673 51.639,75.483 53.544,75.483 56.084,75.483 58.18,75.483 58.497,75.673 58.497,77.896 58.878,78.213 59.259,78.213 59.577,78.213 61.99,78.213 65.355,78.213 66.909,76.718 66.909,74.813 67.48,74.242 67.671,74.242 68.115,74.813 68.149,77.515 68.153,77.95 68.022,78.086 65.99,80.245 65.101,79.991 64.657,79.293 61.291,79.293 59.416,80.846 59.352,82.433 58.781,82.878
  region net VCC: 51.724,60.263 51.796,60.335 52.875,60.335 51.724,60.263
  region net VCC: 51.351,62.367 51.796,62.748 57.638,62.748 58.082,62.494 58.082,60.907 57.638,60.589 56.876,60.589 56.558,60.335 56.558,59.764 56.241,59.51 51.605,59.51 51.351,59.764 51.351,60.145
  region net VCC: 51.415,66.241 51.415,66.495 51.415,66.622 51.796,66.939 56.304,66.939 57.701,66.939 58.019,66.812 58.019,65.225 57.765,64.971 56.939,64.971 56.558,64.653 56.558,63.51 56.368,63.383 51.669,63.383 51.415,63.637 51.415,63.701
  region net SHC: 50.843,55.573 50.843,56.271 50.653,56.462 47.795,56.462 47.478,56.779 47.478,63.764 47.732,64.018 49.764,64.018 50.145,63.637 50.208,63.256 50.526,62.939 51.097,62.367 51.097,60.399 51.034,60.272 50.208,60.272 49.954,60.145 49.954,59.51 50.653,58.811 54.653,58.811 55.034,58.621 55.034,58.113 55.034,55.636 54.78,55.319 51.224,55.319 50.843,55.573
  region net SHA: 47.859,71.575 47.478,71.956 47.478,78.877 47.732,79.322 50.97,79.322 51.224,79.131 51.224,76.337 51.161,76.274 50.145,76.274 50.018,76.147 50.018,75.575 50.843,74.813 54.717,74.813 54.971,74.623 54.971,71.765 54.78,71.575 47.859,71.575
  region net SHA_CS: 39.823,71.604 39.188,72.112 39.188,78.97 39.696,79.351 46.906,79.385 47.16,79.068 47.189,71.985 46.935,71.604 39.823,71.604
  region net SHC_CS: 47.16,58.049 47.16,56.716 46.906,56.462 39.955,56.496 39.184,57.021 39.184,63.498 39.591,64.006 46.906,64.018 47.16,63.764 47.16,58.049 47.131,57.195
  region net VCC: 52.558,52.842 52.558,54.684 53.129,55.065 55.098,55.065 56.177,55.065 56.587,54.586 57.349,53.824 59.289,53.795 59.797,53.223 59.733,49.731 59.035,49.286 55.288,49.286 54.78,49.667 54.78,50.493 54.78,50.556 52.939,52.461
Mid-Layer 1:
  region net SHA_CS: 39.794,71.575 39.159,72.083 39.159,78.941 39.667,79.322 46.877,79.356 47.131,79.039 47.16,71.956 46.906,71.575 39.794,71.575
  region net SHA: 47.829,71.546 47.448,71.927 47.448,78.848 47.702,79.293 50.941,79.293 51.195,79.102 51.224,75.575 51.732,75.194 54.336,75.194 54.941,74.594 54.941,71.736 54.751,71.546 47.829,71.546
  region net SHC_CS: 47.131,58.02 47.131,56.687 46.877,56.433 39.926,56.467 39.155,56.992 39.155,63.469 39.562,63.977 46.877,63.989 47.131,63.735 47.131,58.02 47.102,57.166
  region net SHC: 55.005,55.607 54.751,55.29 48.176,55.319 47.478,55.827 47.448,63.735 47.702,63.989 50.653,64.018 51.097,63.447 51.097,59.764 51.669,59.256 54.399,59.129 54.971,58.748 55.005,55.607
  region net SHB: 48.303,64.272 39.565,64.298 39.184,64.679 39.159,70.94 39.731,71.384 54.653,71.384 54.971,71.067 54.971,67.447 54.844,67.257 51.478,67.257 51.097,66.939 51.097,66.876 51.097,66.368 51.097,64.653 50.843,64.272 48.303,64.272
Mid-Layer 2:
  region net SHA_CS: 39.791,71.581 39.156,72.089 39.156,78.947 39.664,79.328 46.874,79.363 47.128,79.045 47.157,71.962 46.903,71.581 39.791,71.581
  region net SHC_CS: 47.128,58.027 47.128,56.693 46.874,56.439 39.924,56.473 39.152,56.998 39.152,63.475 39.559,63.983 46.874,63.996 47.128,63.742 47.128,58.027 47.099,57.172
  region net SHB: 47.16,64.526 46.703,64.298 39.565,64.298 39.184,64.679 39.159,70.94 39.731,71.384 46.906,71.384 47.16,71.13
Bottom Layer:
  region net SHA_CS: 39.823,71.604 39.188,72.112 39.188,78.97 39.696,79.351 46.554,79.351 47.062,78.97 47.062,71.858 46.681,71.604 39.823,71.604
  region net SHC_CS: 39.159,57.033 39.194,63.46 39.604,64.018 46.652,64.018 47.16,63.383 47.16,58.049 45.827,56.462 40.302,56.462 39.921,56.462
  region net SHB: 39.569,64.238 39.188,64.619 39.159,70.876 39.731,71.321 46.716,71.321 47.16,71.003 47.16,64.844 46.681,64.238 44.395,64.238 39.569,64.238

## Silkscreen, mask and mechanical layers (free items; w line width, h text height)
Top Overlay:
  text "MOSI" at 59.924,87.914 h0.8 r180
  text "TX" at 86.359,86.561 h0.8 r90
  text "RX" at 88.899,86.561 h0.8 r90
  text "SCK" at 54.418,85.799 h0.8 r90
  text "MISO" at 56.831,85.545 h0.8 r90
  text "GND" at 52.261,85.32 h1 r90
  text "A" at 84.475,85.279 h1 r201
  text "SDA" at 46.779,84.891 h0.8
  text "SCL" at 39.159,84.828 h0.8
  text "B" at 84.654,82.264 h1 r180
  text "I" at 84.879,79.187 h1 r180
  text "AH" at 62.019,75.457 h1
  text "GND" at 82.876,75.168 h1
  text "Solder to  / enable pullups" at 78.458,75.131 h1 r90
  text "VDD" at 82.911,73.107 h1
  text "AL" at 62.337,71.393 h1
  text "VDS" at 79.163,68.153 h1
  text "BH" at 62.4,67.202 h1
  text "VDD" at 78.401,67.133 h0.5
  text "config" at 80.58,66.821 h1 r355
  text "GND" at 79.608,65.863 h0.5
  text "75k-GND" at 79.544,64.784 h0.5
  text "GND" at 75.862,62.562 h0.5
  text "BL" at 63.946,62.315 h1 r69
  text "18k-VDD" at 77.322,61.292 h0.5
  text "VDD" at 75.926,60.022 h0.5
  text "CH" at 62.654,59.137 h1
  text "+" at 71.446,58.65 h0.8 r135
  text "IDRIVE" at 73.576,56.661 h1
  text "CL" at 63.181,55.767 h1 r68
  text "config" at 74.866,55.456 h1 r355
  text "V1.2" at 84.879,53.986 h1.52 r90
  text "+" at 43.76,52.363 h0.8 r135
  text "FOC" at 74.255,50.049 h2.5 r90
  text "VCC" at 39.696,46.747 h1.2
  text "GND" at 46.935,46.747 h1.2
  text "Input" at 50.843,46.378 h1.5
  text "Simple" at 70.698,45.709 h2.5 r89
  text "Drive" at 85.269,44.68 h2.5 r90
  text "Arduino Headers R3 / BLDC motor (30 Amps max) /       Encoder/Hall /       Current Sense Inline" at 86.805,44.553 h1 r90
  text "8-35V" at 50.843,43.901 h1.5
  text "3.3V" at 58.619,43.264 h0.8
  text "5V" at 61.921,43.264 h0.8
  text "VIN" at 69.287,43.264 h0.8
  text "GND" at 64.969,43.164 h1
  text "+" at 38.454,40.97 h1 r225
Bottom Overlay:
  text "11" at 57.963,86.625 h1 r270
  text "12" at 82.593,86.315 h1
  text "ENA" at 85.633,86.307 h1 r90
  text "5" at 75.418,86.252 h1
  text "7" at 69.977,86.171 h1 r25
  text "3" at 77.958,86.188 h1
  text "13" at 56.368,86.125 h1
  text "10" at 62.21,86.125 h1
  text "9" at 64.198,86.126 h1 r355
  text "8" at 67.544,86.125 h1
  text "A4" at 81.26,85.236 h1
  text "3" at 83.546,85.172 h1
  text "INA" at 54.907,83.966 h1
  text "INC" at 77.259,83.585 h1
  text "INB" at 63.734,83.521 h1
  text "EN" at 69.322,83.521 h1
  text "ENB" at 85.57,82.815 h1 r90
  text "6" at 57.277,82.634 h1 r355
  text "2" at 83.482,81.807 h1
  text "A5" at 81.45,81.743 h1
  text "DRV8320 pinout  / config PWM & enable" at 72.052,81.108 h1
  text "Encoder/Hall / pinout config" at 78.077,80.973 h1 r90
  text "ENC" at 85.633,79.322 h1 r90
  text "4" at 83.776,76.759 h1 r36
  text "13" at 81.323,76.663 h1
  text "M3" at 43.795,76.02 h1.14
  text "11" at 82.03,76.02 h1 r270
  text "docs.simplefoc.com / 08/2024" at 91.031,71.185 h1 r89
  text "M2" at 43.795,69.02 h1.14
  text "M1" at 43.795,62.02 h1.14
  text "DRV8320 / Fault" at 85.324,55.835 h1
  text "nFLT" at 80.299,54.113 h1 r90
  text "A3" at 82.903,53.351 h1 r90
  text "Current sense / pinoout" at 87.737,48.406 h1
  text "Input" at 52.685,48.346 h1.5
  text "CS1" at 76.688,46.31 h1
  text "CS3" at 81.704,46.183 h1
  text "8-35V" at 53.193,45.425 h1.5
  text "VDD" at 67.607,44.977 h1
  text "3.3V" at 59.416,44.659 h1
  text "config" at 67.524,43.708 h1 r5
  text "5V" at 60.876,42.945 h1
  text "A2" at 80.117,42.945 h1
  text "A0" at 74.91,42.881 h1
  text "A1" at 77.513,42.881 h1
  text "A3" at 82.72,42.818 h1
  text "VCC" at 43.633,39.1 h1
  text "GND" at 48.713,39.1 h1